# EAGLE board SchematicTSC (EAGLE 9.7.0)
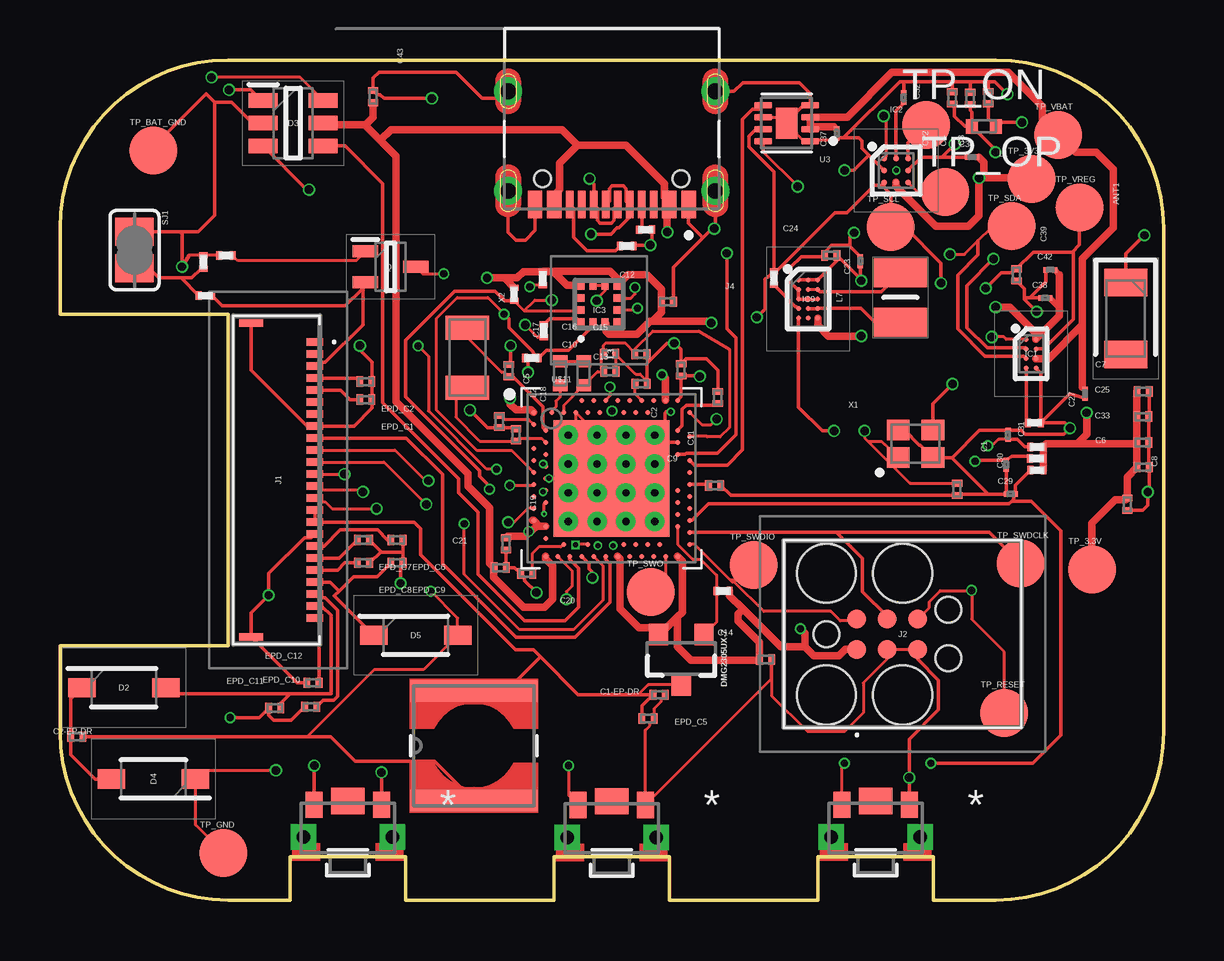
[diagram p0: board, top side]
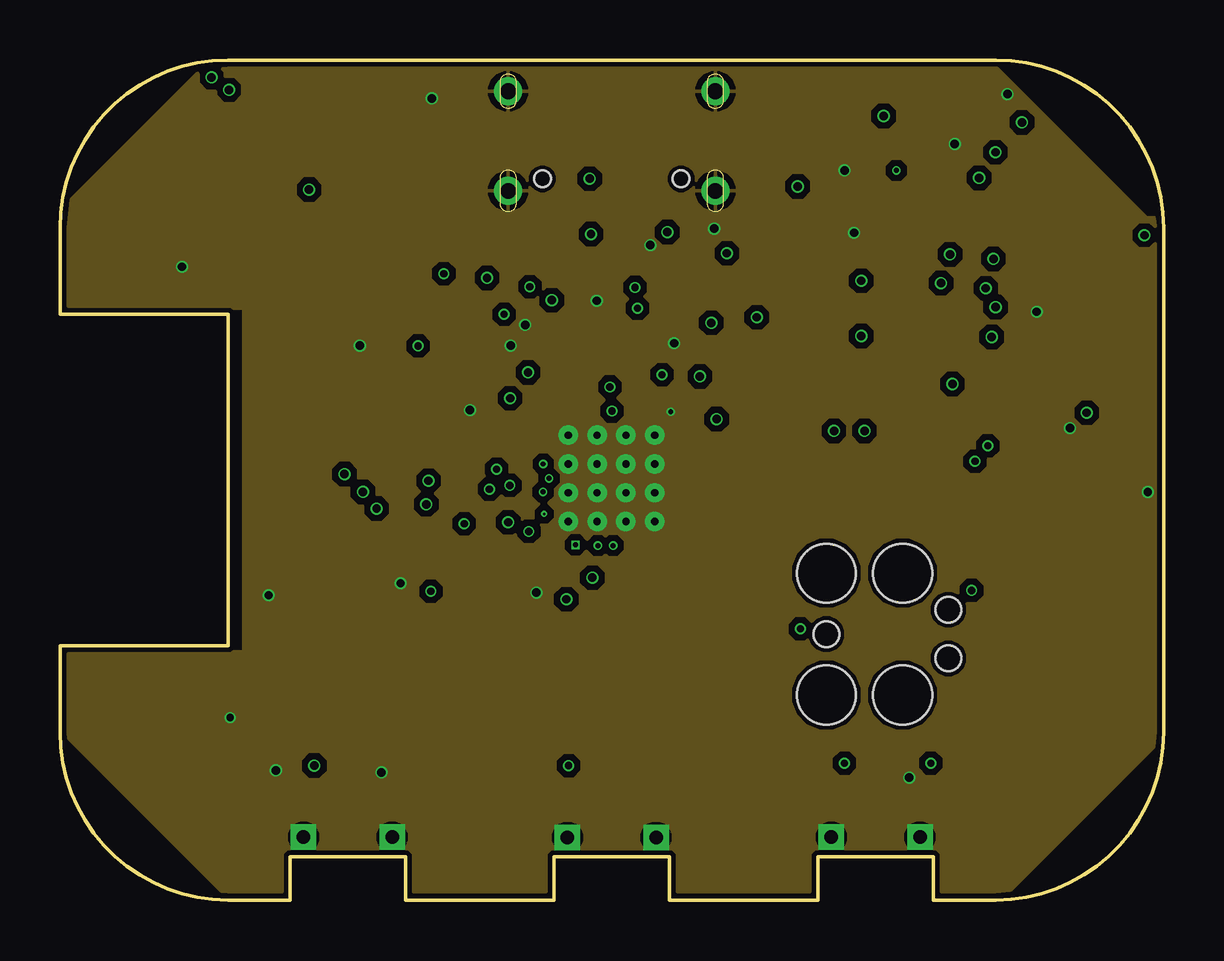
[diagram p1: board, inner layer Route2]
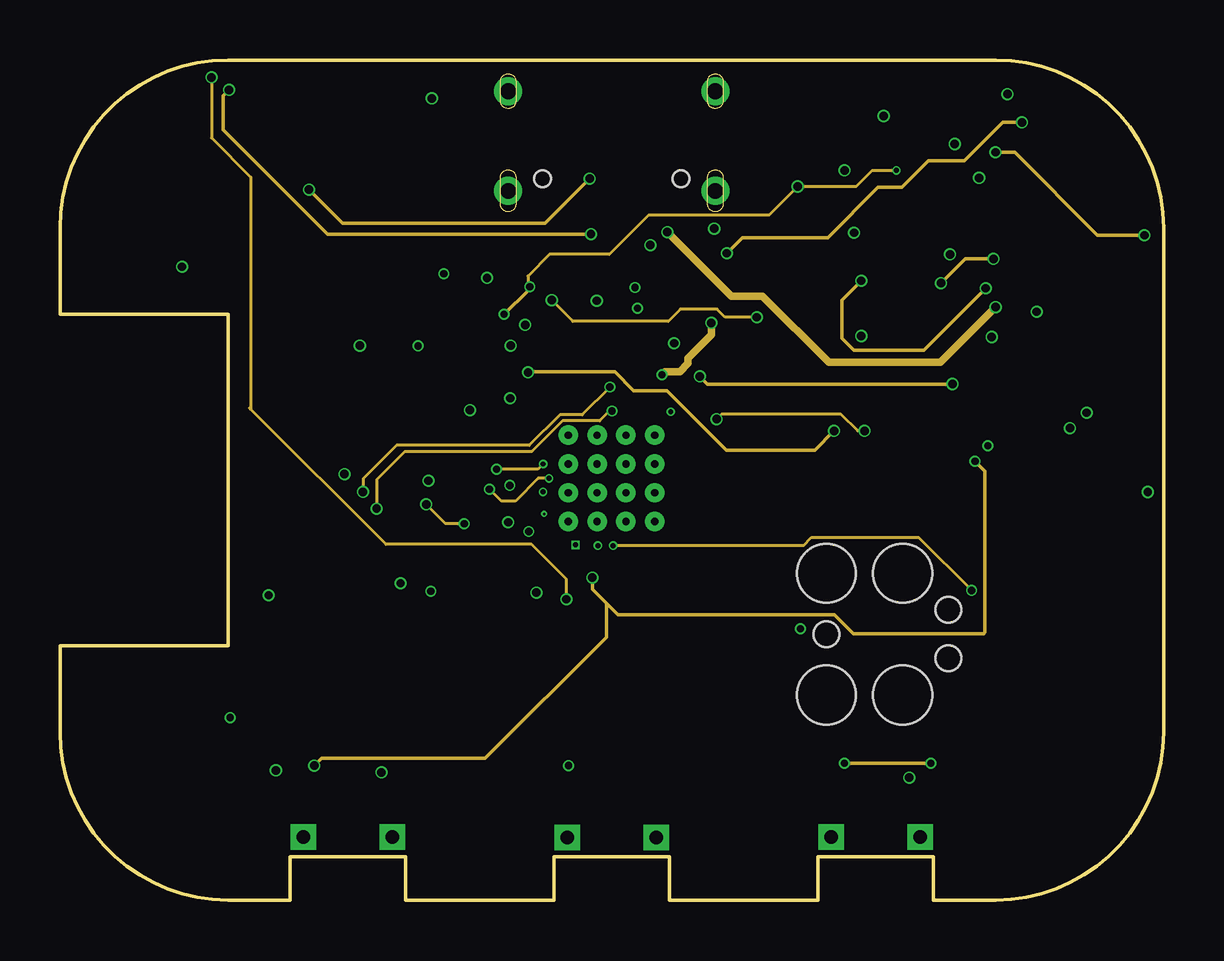
[diagram p2: board, inner layer Route63]
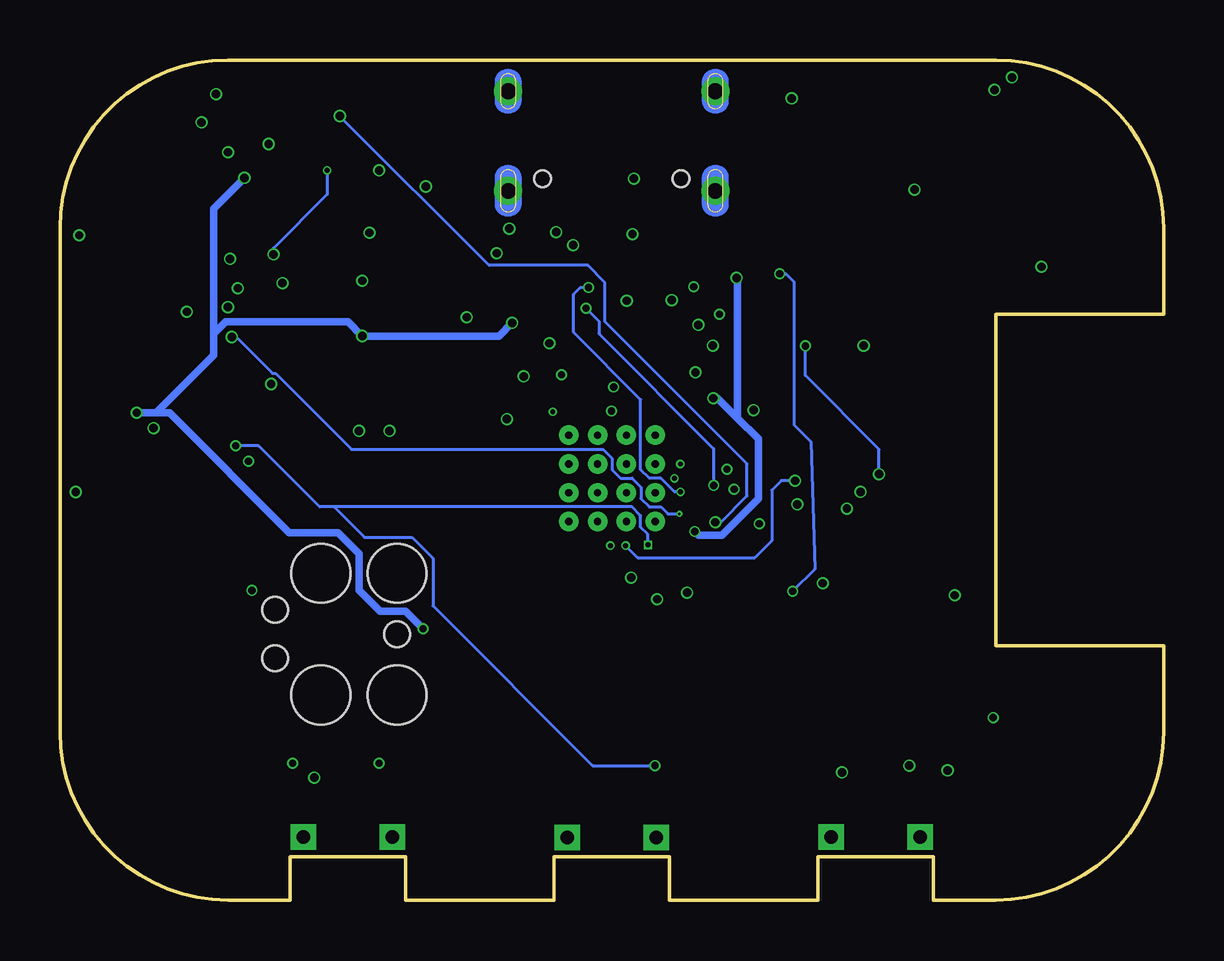
[diagram p3: board, bottom side, seen from below]

Size 46 x 35 mm. Coordinates in mm from the lower left corner, seen from the top.
Outline: 39,0 36.4,0 36.4,1.8 31.6,1.8 31.6,0 25.4,0 25.4,1.8 20.6,1.8 20.6,0 14.4,0 14.4,1.8 9.6,1.8 9.6,0 7,0 arc-90 0,7 0,10.6 7,10.6 7,24.4 0,24.4 0,28 arc-90 7,35 39,35 arc-90 46,28 46,7 arc-90 39,0
Copper layers (1+2*15+16): Top / Route2 / Route63 / Bottom
Stack-up 4 Layer Stack: Top SilkScreen Epoxy Ink / Top SolderMask SR:Green 0.0254mm Dk 4.3 / Top Surface Finish Lead-Free 0.02mm / Top User Defined 0.0151mm / Dielectric-1 User Defined 0.15mm / Route2 User Defined 0.0145mm / Dielectric-3 User Defined 0.55mm / Route63 User Defined 0.0145mm / Dielectric-5 User Defined 0.15mm / Bottom User Defined 0.0151mm / Bottom Surface Finish Lead-Free 0.02mm / Bottom SolderMask SR:Green 0.0254mm Dk 4.3 / Bottom SilkScreen Epoxy Ink
Design rules: minimum copper width 5mil, minimum drill size 0.3mm, copper clearance wire_polygon to wire_polygon 5mil, copper clearance wire_polygon to pad_smd 5mil, copper clearance wire_polygon to via 5mil, copper clearance pad_smd to pad_smd 5mil, copper clearance pad_smd to via 5mil, copper clearance via to via 5mil, copper clearance smd to pad (same net) 5mil, copper clearance smd to via (same net) 5mil, copper clearance smd to smd (same net) 5mil, dimension clearance 0.2mm, via restrict clearance 0mil, restrict clearance 0mil, drill distance 6mil, keepout clearance 0mil

## Footprints (pad centres in the part's own frame; a part is rotated, then mirrored left to right if it is on the bottom)
2450AT18B100E_ANTC3216X140N = smd 1.15 x 1.8: 1 -1.5,0; 2 1.5,0
NORDIC_NRF_3_RESC0201_L = smd 0.28 x 0.43: 1 -0.255,0; 2 0.255,0
GRM011R60J152KE01L_2_CAPC0201X13N = smd 0.22 x 0.23: 1 -0.185,0; 2 0.185,0
ESP32_C6_LIBRARY_5_SOD3716X135N = smd 1.15 x 0.8: 1 -1.75,0; 2 1.75,0
ESP32_C6_LIBRARY_3_SOT95P280X145-6N = smd 1.2 x 0.6: 1 -1.25,0.95; 2 -1.25,0; 3 -1.25,-0.95; 4 1.25,-0.95; 5 1.25,0; 6 1.25,0.95
ESP32_C6_LIBRARY_4_ESP32_C6_LIBRARY_4_ESP32_C6_LIBRARY_4_ESP32_C6_LIBRARY_4_ESP32_WROVER_SPARKFUN-DISCRETESEMI_SOT23-3 = smd 0.8 x 0.9: 1 -0.95,-1; 2 0.95,-1; 3 0,1.1
BQ25180YBGR_BGA8C40P2X4_100X155X50 = smd 0.2 x 0.2: A1 -0.2,0.6; A2 0.2,0.6; B1 -0.2,0.2; B2 0.2,0.2; C1 -0.2,-0.2; C2 0.2,-0.2; D1 -0.2,-0.6; D2 0.2,-0.6
DRV2605YZFR_BGA9C50P3X3_144X144X62 = smd 0.25 x 0.25: A1 -0.5,0.5; A2 0,0.5; A3 0.5,0.5; B1 -0.5,0; B2 0,0; B3 0.5,0; C1 -0.5,-0.5; C2 0,-0.5; C3 0.5,-0.5
BMA423_BMA423 = smd 0.3 x 0.35: 1 -0.75,-0.775; 2 -0.25,-0.775; 3 0.25,-0.775; 4 0.75,-0.775; 7 0.75,0.775; 8 0.25,0.775; 9 -0.25,0.775; 10 -0.75,0.775 | smd 0.35 x 0.3: 5 0.775,-0.25; 6 0.775,0.25; 11 -0.775,0.25; 12 -0.775,-0.25
RT6160AWSC_BGA15C40P3X5_140X230X60 = smd 0.216 x 0.216: A1 -0.4,0.8; A2 0,0.8; A3 0.4,0.8; B1 -0.4,0.4; B2 0,0.4; B3 0.4,0.4; C1 -0.4,0; C2 0,0; C3 0.4,0; D1 -0.4,-0.4; D2 0,-0.4; D3 0.4,-0.4; E1 -0.4,-0.8; E2 0,-0.8; E3 0.4,-0.8
503480-2400_5034802400 = smd 0.3 x 0.7: 1 -5.75,1.525; 2 -5.25,1.525; 3 -4.75,1.525; 4 -4.25,1.525; 5 -3.75,1.525; 6 -3.25,1.525; 7 -2.75,1.525; 8 -2.25,1.525; 9 -1.75,1.525; 10 -1.25,1.525; 11 -0.75,1.525; 12 -0.25,1.525; 13 0.25,1.525; 14 0.75,1.525; 15 1.25,1.525; 16 1.75,1.525; 17 2.25,1.525; 18 2.75,1.525; 19 3.25,1.525; 20 3.75,1.525; 21 4.25,1.525; 22 4.75,1.525; 23 5.25,1.525; 24 5.75,1.525 | smd 0.3 x 1: MP1 -6.54,-1.125; MP2 6.54,-1.125
TC2030-IDC_TC2030IDC = smd 0.783 x 0.783: 1 -0.953,-0.635; 2 -0.953,0.635; 3 0.317,-0.635; 4 0.317,0.635; 5 1.588,-0.635; 6 1.588,0.635 | hole 2.451: -2.223,-2.54; -2.223,2.54; 0.952,-2.54; 0.952,2.54 | hole 1.067: -2.223,0; 2.857,-1.016; 2.857,1.016
KH-TYPE-C-16P_KINGHELM_KH-TYPE-C-16P = smd 0.6 x 1.15: A1_B12 -3.2,4.725; A4_B9 -2.4,4.725; A9_B4 2.4,4.725; A12_B1 3.2,4.725 | smd 0.3 x 1.15: A5 -1.25,4.725; A6 -0.25,4.725; A7 0.25,4.725; A8 1.25,4.725; B5 1.75,4.725; B6 0.75,4.725; B7 -0.75,4.725; B8 -1.75,4.725 | drill 0.65 pad 1.05: SH1 -4.32,0; SH2 4.32,0; SH3 -4.32,4.15; SH4 4.32,4.15 | hole 0.7: -2.89,3.65; 2.89,3.65
NORDIC_NRF_2_RESC0402_L = smd 0.5 x 0.6: 1 -0.5,0; 2 0.5,0
ESP32_C6_LIBRARY_2_IND_4828-WE-TPC_WRE = smd 0.9 x 5.3: 1 -2.286,0; 2 2.286,0
MLP2016SR47MT0S1_INDC2016X100N = smd 1.2 x 2.2: 1 -1.028,0; 2 1.028,0
ESP32_C6_LIBRARY_6_SOT65P210X110-3N = smd 1.05 x 0.5: 1 -1.05,0.65; 2 -1.05,-0.65; 3 1.05,0
CPF0201D7K68C1_0201 = smd 0.35 x 0.25: 1 0,0.275; 2 0,-0.275
ESP32_C6_LIBRARY_7_JUMPER_SJ = smd 1.168 x 1.6: 1 -0.762,0; 2 0.762,0
2025-10-22_07-23-44_LIBRARY_SW_EVP-AKE31A_PAN = smd 0.711 x 1.092: 1 -1.4,-0.972; 2 1.4,-0.972 | drill 0.559 pad 0.914 square: 3 -1.848,0.381; 4 1.848,0.381 | smd 1.397 x 1.092: 5 0,-1.124
HECTOR_WATCH_1_TP20R = smd 2 x 2: TP 0,0
ESP32_C6_LIBRARY_SON50P200X200X80-9N = smd 0.76 x 0.27: 1 -0.985,0.75; 2 -0.985,0.25; 3 -0.985,-0.25; 4 -0.985,-0.75; 5 0.985,-0.75; 6 0.985,-0.25; 7 0.985,0.25; 8 0.985,0.75 | smd 0.9 x 1.3: 9 0,0
NORDIC_NRF_4_AQFN50P700X700X85_HS-74N = smd 4.85 x 4.85: P$74 0,0 | drill 0.3 pad 0.6: P$75 -1.8,1.8; P$76 -0.6,1.8; P$77 0.6,1.8; P$78 1.8,1.8; P$79 -1.8,0.6; P$80 -0.6,0.6; P$81 0.6,0.6; P$82 1.8,0.6; P$83 -1.8,-0.6; P$84 -0.6,-0.6; P$85 0.6,-0.6; P$86 1.8,-0.6; P$87 -1.8,-1.8; P$88 -0.6,-1.8; P$89 0.6,-1.8; P$90 1.8,-1.8 | smd 0.2 x 0.2: P$A8 -1.25,3.25; P$A10 -0.75,3.25; P$A12 -0.25,3.25; P$A14 0.25,3.25; P$A16 0.75,3.25; P$A18 1.25,3.25; P$A20 1.75,3.25; P$A22 2.25,3.25; P$A23 2.75,3.25; P$AA24 3.25,-2.25; P$AB2 -2.75,-2.5; P$AC5 -2,-2.75; P$AC9 -1,-2.75; P$AC11 -0.5,-2.75; P$AC13 0,-2.75; P$AC15 0.5,-2.75; P$AC17 1,-2.75; P$AC19 1.5,-2.75; P$AC21 2,-2.75; P$AC24 3.25,-2.75; P$AD2 -2.75,-3.25; P$AD4 -2.25,-3.25; P$AD6 -1.75,-3.25; P$AD8 -1.25,-3.25; P$AD10 -0.75,-3.25; P$AD12 -0.25,-3.25; P$AD14 0.25,-3.25; P$AD16 0.75,-3.25; P$AD18 1.25,-3.25; P$AD20 1.75,-3.25; P$AD22 2.25,-3.25; P$AD23 2.75,-3.25; P$B1 -3.25,2.75; P$B3 -2.5,2.75; P$B5 -2,2.75; P$B7 -1.5,2.75; P$B9 -1,2.75; P$B11 -0.5,2.75; P$B13 0,2.75; P$B15 0.5,2.75; P$B17 1,2.75; P$B19 1.5,2.75; P$B24 3.25,2.75; P$C1 -3.25,2.25; P$D2 -2.75,2; P$D23 2.75,2; P$E24 3.25,1.75; P$F2 -2.75,1.5; P$F23 2.75,1.5; P$G1 -3.25,1.25; P$H2 -2.75,1; P$H23 2.75,1; P$J1 -3.25,0.75; P$J24 3.25,0.75; P$K2 -2.75,0.5; P$L1 -3.25,0.25; P$L24 3.25,0.25; P$M2 -2.75,0; P$N1 -3.25,-0.25; P$N24 3.25,-0.25; P$P2 -2.75,-0.5; P$P23 2.75,-0.5; P$R1 -3.25,-0.75; P$R24 3.25,-0.75; P$T2 -2.75,-1; P$T23 2.75,-1; P$U1 -3.25,-1.25; P$U24 3.25,-1.25; P$V23 2.75,-1.5; P$W1 -3.25,-1.75; P$W24 3.25,-1.75; P$Y2 -2.75,-2; P$Y23 2.75,-2
NORDIC_NRF_BT-XTAL_2016_N = smd 0.95 x 0.85: 1 -0.725,-0.575; 2 0.725,-0.575; 3 0.725,0.575; 4 -0.725,0.575
NORDIC_NRF_1_XTAL_3215_N = smd 1 x 1.8: 1 -1.25,0; 2 1.25,0

## Placement (x,y rotation side)
ANT1  2450AT18B100E  [2450AT18B100E_ANTC3216X140N]  44.42,24.23 270 top
C1  12pF  [NORDIC_NRF_3_RESC0201_L]  37.39,17.11 270 top
C1-EP-DR  10uF  [NORDIC_NRF_3_RESC0201_L]  24.51,7.56 0 top
C2  12pF  [NORDIC_NRF_3_RESC0201_L]  25.89,22.09 90 top
C2-EP-DR  4.7uF/25V  [NORDIC_NRF_3_RESC0201_L]  0.71,6.8 0 top
C3  1pF  [NORDIC_NRF_3_RESC0201_L]  38.69,33.43 90 top
C4  1pF  [NORDIC_NRF_3_RESC0201_L]  37.94,33.4 90 top
C5  100nF  [NORDIC_NRF_3_RESC0201_L]  18.31,19.94 270 top
C6  4.7μF  [NORDIC_NRF_3_RESC0201_L]  45.15,18.03 0 top
C7  100nF  [NORDIC_NRF_3_RESC0201_L]  45.15,21.19 0 top
C8  100nF  [NORDIC_NRF_3_RESC0201_L]  44.49,16.49 270 top
C9  820pF  [NORDIC_NRF_3_RESC0201_L]  27.29,17.27 0 top
C10  N. C.  [NORDIC_NRF_3_RESC0201_L]  22.92,22.02 0 top
C11  100pF  [NORDIC_NRF_3_RESC0201_L]  27.42,20.94 90 top
C12  100nF  [NORDIC_NRF_3_RESC0201_L]  25.32,24.93 0 top
C13  N. C.  [NORDIC_NRF_3_RESC0201_L]  24.22,21.51 0 top
C14  4.7μF  [NORDIC_NRF_3_RESC0201_L]  29.41,10.02 0 top
C15  1.0μF  [NORDIC_NRF_3_RESC0201_L]  24.21,22.74 0 top
C16  47nF  [NORDIC_NRF_3_RESC0201_L]  22.91,22.76 0 top
C17  12pF  [NORDIC_NRF_3_RESC0201_L]  18.71,22.06 270 top
C18  12pF  [NORDIC_NRF_3_RESC0201_L]  19.01,19.38 270 top
C19  100nF  [NORDIC_NRF_3_RESC0201_L]  18.59,14.84 270 top
C20  4.7μF  [NORDIC_NRF_3_RESC0201_L]  19.45,13.61 180 top
C21  4.7μF  [NORDIC_NRF_3_RESC0201_L]  18.35,13.85 0 top
C22  N. C.  [NORDIC_NRF_3_RESC0201_L]  37.19,33.42 90 top
C23  0.1uF  [GRM011R60J152KE01L_2_CAPC0201X13N]  33.36,26.62 90 top
C24  10uF  [NORDIC_NRF_3_RESC0201_L]  32.13,26.86 0 top
C25  22uF  [NORDIC_NRF_3_RESC0201_L]  45.13,20.14 0 top
C27  0.1uF  [GRM011R60J152KE01L_2_CAPC0201X13N]  42.72,21.09 90 top
C29  1uF  [GRM011R60J152KE01L_2_CAPC0201X13N]  39.63,16.91 0 top
C30  1uF  [GRM011R60J152KE01L_2_CAPC0201X13N]  39.43,18.14 90 top
C31  1uF  [GRM011R60J152KE01L_2_CAPC0201X13N]  39.52,19.38 270 top
C32  1uF  [GRM011R60J152KE01L_2_CAPC0201X13N]  35.17,33.44 270 top
C33  22uF  [NORDIC_NRF_3_RESC0201_L]  45.13,19.06 0 top
C34  0.1uF  [GRM011R60J152KE01L_2_CAPC0201X13N]  38.02,30.95 0 top
C37  1uF  [GRM011R60J152KE01L_2_CAPC0201X13N]  32.37,31.94 90 top
C38  1uF  [GRM011R60J152KE01L_2_CAPC0201X13N]  41.07,25.08 0 top
C39  10uF  [NORDIC_NRF_3_RESC0201_L]  39.87,26.05 270 top
C42  0.1uF  [GRM011R60J152KE01L_2_CAPC0201X13N]  41.28,26.26 0 top
C43  4.7uF  [NORDIC_NRF_3_RESC0201_L]  13.05,33.47 270 top
D2  MBR0530  [ESP32_C6_LIBRARY_5_SOD3716X135N]  2.66,8.85 0 top
D3  USBLC6-2SC6Y  [ESP32_C6_LIBRARY_3_SOT95P280X145-6N]  9.72,32.37 0 top
D4  MBR0530  [ESP32_C6_LIBRARY_5_SOD3716X135N]  3.9,5.04 180 top
D5  MBR0530  [ESP32_C6_LIBRARY_5_SOD3716X135N]  14.83,11.03 0 top
DMG2305UX-7  20V/4.2A/52mΩ/1.4W  [ESP32_C6_LIBRARY_4_ESP32_C6_LIBRARY_4_ESP32_C6_LIBRARY_4_ESP32_C6_LIBRARY_4_ESP32_WROVER_SPARKFUN-DISCRETESEMI_SOT23-3]  25.9,10.06 180 top
EPD_C1  1uF/50V  [NORDIC_NRF_3_RESC0201_L]  12.75,20.85 180 top
EPD_C2  1uF/50V  [NORDIC_NRF_3_RESC0201_L]  12.75,21.6 180 top
EPD_C5  1uF/50V  [NORDIC_NRF_3_RESC0201_L]  24.98,8.55 180 top
EPD_C6  1uF/50V  [NORDIC_NRF_3_RESC0201_L]  14.05,15 180 top
EPD_C7  1uF/50V  [NORDIC_NRF_3_RESC0201_L]  12.65,15 180 top
EPD_C8  1uF/50V  [NORDIC_NRF_3_RESC0201_L]  12.65,14.05 180 top
EPD_C9  1uF/50V  [NORDIC_NRF_3_RESC0201_L]  14.05,14.05 180 top
EPD_C10  1uF/50V  [NORDIC_NRF_3_RESC0201_L]  10.45,8.05 0 top
EPD_C11  1uF/50V  [NORDIC_NRF_3_RESC0201_L]  8.95,8 0 top
EPD_C12  1uF/50V  [NORDIC_NRF_3_RESC0201_L]  10.55,9.05 0 top
IC1  BQ25180YBGR  [BQ25180YBGR_BGA8C40P2X4_100X155X50]  40.48,22.76 0 top
IC2  DRV2605YZFR  [DRV2605YZFR_BGA9C50P3X3_144X144X62]  34.85,30.4 0 top
IC3  BMA423_BMA423  [BMA423_BMA423]  22.47,24.83 0 top
IC9  RT6160AWSC  [RT6160AWSC_BGA15C40P3X5_140X230X60]  31.19,25.04 0 top
J1  503480-2400  [503480-2400_5034802400]  9.1,17.5 270 top
J2  IDC_TC2030-IDC  [TC2030-IDC_TC2030IDC]  34.17,11.08 0 top
J4  KH-TYPE-C-16P  [KH-TYPE-C-16P_KINGHELM_KH-TYPE-C-16P]  23,33.7 180 top
L1  3.9nH  [NORDIC_NRF_2_RESC0402_L]  38.52,32.23 180 top
L2  10μH  [NORDIC_NRF_2_RESC0402_L]  20.85,21.94 90 top
L3  15nH  [NORDIC_NRF_2_RESC0402_L]  21.83,21.94 270 top
L5  68uH  [ESP32_C6_LIBRARY_2_IND_4828-WE-TPC_WRE]  17.25,6.43 90 top
L7  FTC252012SR47MBCA  [MLP2016SR47MT0S1_INDC2016X100N]  35.03,25.11 270 top
Q3  SI1308EDL-T1-GE3  [ESP32_C6_LIBRARY_6_SOT65P210X110-3N]  13.78,26.38 0 top
R1_EP_DR  0.47  [CPF0201D7K68C1_0201]  6.06,25.18 90 top
R1_USB  5K1  [CPF0201D7K68C1_0201]  24.41,27.93 270.4 top
R2  0  [CPF0201D7K68C1_0201]  19.67,22.58 270 top
R2_EP_DR  10K  [CPF0201D7K68C1_0201]  6.92,26.86 90 top
R2_USB  5K1  [CPF0201D7K68C1_0201]  23.63,27.25 90 top
R3  0  [CPF0201D7K68C1_0201]  20.17,23.72 0 top
R4  0  [CPF0201D7K68C1_0201]  29.76,25.92 0 top
R5  10K  [CPF0201D7K68C1_0201]  40.71,18.4 90 top
R7  10K  [CPF0201D7K68C1_0201]  40.72,17.91 90 top
R8  10K  [CPF0201D7K68C1_0201]  40.72,18.88 90 top
R9  10K  [CPF0201D7K68C1_0201]  40.62,19.88 270 top
R17  3K3  [CPF0201D7K68C1_0201]  18.93,25.24 0 top
R18  3K3  [CPF0201D7K68C1_0201]  20.13,25.9 0 top
R_PWR_EPD  10K  [CPF0201D7K68C1_0201]  27.64,12.88 90 top
R_TYPE_SEL  2.2  [CPF0201D7K68C1_0201]  5.98,26.58 0 top
SJ1  [ESP32_C6_LIBRARY_7_JUMPER_SJ]  3.11,27.08 270 top
SW_DN  2025-10-22_07-23-44_LIBRARY_EVP-AKE31ASW_EVP-AKE31A_PAN  [2025-10-22_07-23-44_LIBRARY_SW_EVP-AKE31A_PAN]  34,3 180 top
SW_ENT  2025-10-22_07-23-44_LIBRARY_EVP-AKE31ASW_EVP-AKE31A_PAN  [2025-10-22_07-23-44_LIBRARY_SW_EVP-AKE31A_PAN]  23,2.99 180 top
SW_UP  2025-10-22_07-23-44_LIBRARY_EVP-AKE31ASW_EVP-AKE31A_PAN  [2025-10-22_07-23-44_LIBRARY_SW_EVP-AKE31A_PAN]  12,3 180 top
TP_3.3V  HECTOR_WATCH_1_TPTP20R  [HECTOR_WATCH_1_TP20R]  43.02,13.78 0 top
TP_3V3  HECTOR_WATCH_1_TPTP20R  [HECTOR_WATCH_1_TP20R]  40.5,30.04 0 top
TP_BAT_GND  HECTOR_WATCH_1_TPTP20R  [HECTOR_WATCH_1_TP20R]  3.89,31.23 0 top
TP_GND  HECTOR_WATCH_1_TPTP20R  [HECTOR_WATCH_1_TP20R]  6.82,1.96 0 top
TP_ON  HECTOR_WATCH_1_TPTP20R  [HECTOR_WATCH_1_TP20R]  36.1,32.3 0 top
TP_OP  HECTOR_WATCH_1_TPTP20R  [HECTOR_WATCH_1_TP20R]  36.9,29.5 0 top
TP_RESET  HECTOR_WATCH_1_TPTP20R  [HECTOR_WATCH_1_TP20R]  39.36,7.8 0 top
TP_SCL  HECTOR_WATCH_1_TPTP20R  [HECTOR_WATCH_1_TP20R]  34.63,28.03 0 top
TP_SDA  HECTOR_WATCH_1_TPTP20R  [HECTOR_WATCH_1_TP20R]  39.67,28.08 0 top
TP_SWDCLK  HECTOR_WATCH_1_TPTP20R  [HECTOR_WATCH_1_TP20R]  40.05,14.02 0 top
TP_SWDIO  HECTOR_WATCH_1_TPTP20R  [HECTOR_WATCH_1_TP20R]  28.92,13.96 0 top
TP_SWO  HECTOR_WATCH_1_TPTP20R  [HECTOR_WATCH_1_TP20R]  24.62,12.84 0 top
TP_VBAT  HECTOR_WATCH_1_TPTP20R  [HECTOR_WATCH_1_TP20R]  41.61,31.88 0 top
TP_VREG  HECTOR_WATCH_1_TPTP20R  [HECTOR_WATCH_1_TP20R]  42.5,28.86 0 top
U3  MAX17048G+T10  [ESP32_C6_LIBRARY_SON50P200X200X80-9N]  30.29,32.37 180 top
U$11  NRF52840_QF  [NORDIC_NRF_4_AQFN50P700X700X85_HS-74N]  22.99,17.57 0 top
X1  32MHz  [NORDIC_NRF_BT-XTAL_2016_N]  35.66,19.01 0 top
X2  32.769kHz  [NORDIC_NRF_1_XTAL_3215_N]  16.98,22.6 270 top

## Library data of the parts
ANT1 = InkTime_v5; ARROW_PART_NUMBER: 2450AT18B100E; ARROW_PRICE-STOCK: https://www.arrow.com/en/products/2450at18b100e/johanson-dielectrics?utm_currency=USD&region=nac; DESCRIPTION: Antennas 2.45GHz ANTENNA; HEIGHT: 1.4mm; MANUFACTURER_NAME: JOHANSON TECHNOLOGY; MANUFACTURER_PART_NUMBER: 2450AT18B100E; MOUSER_PART_NUMBER: 609-2450AT18B100E; MOUSER_PRICE-STOCK: https://www.mouser.co.uk/ProductDetail/Johanson-Technology/2450AT18B100E?qs=yCnrNFeXz%252Bh5MFsFIXGZGA%3D%3D
C1 C1-EP-DR C2 C2-EP-DR C3-C22 C24 C25 C33 C39 C43 EPD_C1 EPD_C2 EPD_C5-EPD_C12 L1-L3 R1_EP_DR R1_USB R2 R2_EP_DR R2_USB R3-R5 R7-R9 R17 R18 R_PWR_EPD R_TYPE_SEL SJ1 TP_3.3V TP_3V3 TP_BAT_GND TP_GND TP_ON TP_OP TP_RESET TP_SCL TP_SDA TP_SWDCLK TP_SWDIO TP_SWO TP_VBAT TP_VREG U$11 X1 X2 = InkTime_v5
C23 C27 C29-C32 C34 C37 C38 C42 = InkTime_v5; AVAILABILITY: In Stock; CHECK_PRICES: https://www.snapeda.com/parts/GRM011R60J152KE01L/Murata/view-part/?ref=eda; DESCRIPTION: SMD Capacitor X5R(EIA) with Capacitance: 1500pF Tol. 10%. Rated Voltage: 6.3Vdc; MF: Murata; MP: GRM011R60J152KE01L; PACKAGE: 0201 Murata; PRICE: None; SNAPEDA_LINK: https://www.snapeda.com/parts/GRM011R60J152KE01L/Murata/view-part/?ref=snap
D2 D4 D5 = InkTime_v5; AVAILABILITY: In Stock; CHECK_PRICES: https://www.snapeda.com/parts/MBR0530/Onsemi/view-part/?ref=eda; DESCRIPTION: Diode Schottky 30 V 500mA Surface Mount SOD-123; MF: ON Semiconductor; MP: MBR0530; PACKAGE: SOD-123-2 ON Semiconductor; PRICE: None; PURCHASE-URL: https://www.snapeda.com/api/url_track_click_mouser/?unipart_id=179458&manufacturer=ON Semiconductor&part_name=MBR0530&search_term=None; SNAPEDA_LINK: https://www.snapeda.com/parts/MBR0530/Onsemi/view-part/?ref=snap
D3 = InkTime_v5; AVAILABILITY: In Stock; CHECK_PRICES: https://www.snapeda.com/parts/USBLC6-2SC6Y/STMicroelectronics/view-part/?ref=eda; DESCRIPTION: 17V Clamp 5A (8/20µs) Ipp Tvs Diode Surface Mount SOT-23-6; MF: STMicroelectronics; MP: USBLC6-2SC6Y; PACKAGE: SOT-23-6 STMicroelectronics; PRICE: None; SNAPEDA_LINK: https://www.snapeda.com/parts/USBLC6-2SC6Y/STMicroelectronics/view-part/?ref=snap
DMG2305UX-7 = InkTime_v5; PROD_ID: TRAN-14388
IC1 = InkTime_v5; ARROW_PART_NUMBER: BQ25180YBGR; ARROW_PRICE-STOCK: https://www.arrow.com/en/products/bq25180ybgr/texas-instruments?utm_currency=USD&region=nac; DESCRIPTION: Charger IC Lithium Ion/Polymer, Lithium Iron Phosphate 8-DSBGA (1.6x1.1); HEIGHT: 0.5mm; MANUFACTURER_NAME: Texas Instruments; MANUFACTURER_PART_NUMBER: BQ25180YBGR; MOUSER_PART_NUMBER: 595-BQ25180YBGR; MOUSER_PRICE-STOCK: https://www.mouser.co.uk/ProductDetail/Texas-Instruments/BQ25180YBGR?qs=doiCPypUmgEWjAK%252BJAX6Tw%3D%3D
IC2 = InkTime_v5; ARROW_PART_NUMBER: DRV2605YZFR; ARROW_PRICE-STOCK: https://www.arrow.com/en/products/drv2605yzfr/texas-instruments?region=nac; DESCRIPTION: Haptic Driver for ERM/LRA with Built-In Library and Smart Loop Architecture; HEIGHT: 0.625mm; MANUFACTURER_NAME: Texas Instruments; MANUFACTURER_PART_NUMBER: DRV2605YZFR
IC3 = InkTime_v5; ARROW_PART_NUMBER: BMA423; ARROW_PRICE-STOCK: https://www.arrow.com/en/products/bma423/bosch; DESCRIPTION: Accelerometers Triaxial low-g 12bit Acceleration Sensor; HEIGHT: 1mm; MANUFACTURER_NAME: BOSCH; MANUFACTURER_PART_NUMBER: BMA423; MOUSER_PART_NUMBER: 262-BMA423; MOUSER_PRICE-STOCK: https://www.mouser.co.uk/ProductDetail/Bosch-Sensortec/BMA423?qs=HXFqYaX1Q2xC%252BSgeGoX3mg%3D%3D
IC9 = InkTime_v5; DESCRIPTION: Buck-Boost Regulator Positive Output Step-Up/Step-Down I2C DC-DC Controller IC 15-WL-CSP (BSC) (1.4x2.3); HEIGHT: 0.6mm; MANUFACTURER_NAME: RICHTEK; MANUFACTURER_PART_NUMBER: RT6160AWSC; MOUSER_PART_NUMBER: 835-RT6160AWSC; MOUSER_PRICE-STOCK: https://www.mouser.co.uk/ProductDetail/Richtek/RT6160AWSC?qs=amGC7iS6iy%2FLd9PSoixZXQ%3D%3D
J1 = InkTime_v5; DESCRIPTION: FFC & FPC Connectors 0.5mm FPC RA SMT Dual Contact 24Ckt; HEIGHT: 1.87mm; MANUFACTURER_NAME: Molex; MANUFACTURER_PART_NUMBER: 503480-2400; MOUSER_PART_NUMBER: 538-503480-2400; MOUSER_PRICE-STOCK: https://www.mouser.co.uk/ProductDetail/Molex/503480-2400?qs=OAhjpuo3Vu7efIoxFh9AOw%3D%3D
J2 = InkTime_v5; DESCRIPTION: CABLE ADAPTER 6 POS; HEIGHT: 19mm; MANUFACTURER_NAME: Tag Connect; MANUFACTURER_PART_NUMBER: TC2030-IDC
J4 = InkTime_v5; AVAILABILITY: Not in stock; CHECK_PRICES: https://www.snapeda.com/parts/KH-TYPE-C-16P/Kinghelm/view-part/?ref=eda; MF: kinghelm; MP: KH-TYPE-C-16P; PACKAGE: None; PRICE: None; SNAPEDA_LINK: https://www.snapeda.com/parts/KH-TYPE-C-16P/Kinghelm/view-part/?ref=snap
L5 = InkTime_v5; COPYRIGHT: Copyright (C) 2024 Ultra Librarian. All rights reserved.; MANUFACTURER_PART_NUMBER: 744043680; MFR_NAME: Wurth Electronics
L7 = InkTime_v5; DESCRIPTION: SMD / SMT Inductors (Coils), L=0.47?H, L x W x T :; HEIGHT: 1mm; JLCPCB: https://jlcpcb.com/partdetail/6763488-FTC252012SR47MBCA/C5832368; MANUFACTURER_NAME: TDK; MANUFACTURER_PART_NUMBER: FTC252012SR47MBCA
Q3 = InkTime_v5; AVAILABILITY: In Stock; CHECK_PRICES: https://www.snapeda.com/parts/SI1308EDL-T1-GE3/Vishay+Siliconix/view-part/?ref=eda; DESCRIPTION: Si1308EDL-T1-GE3 N-channel MOSFET Transistor, 1.5 A, 30 V, 3-Pin SC-70 | Siliconix / Vishay SI1308EDL-T1-GE3; MF: Vishay Siliconix; MP: SI1308EDL-T1-GE3; PACKAGE: SOT-323 Vishay Semiconductor; PRICE: None; PURCHASE-URL: https://www.snapeda.com/api/url_track_click_mouser/?unipart_id=274603&manufacturer=Vishay Siliconix&part_name=SI1308EDL-T1-GE3&search_term=None; SNAPEDA_LINK: https://www.snapeda.com/parts/SI1308EDL-T1-GE3/Vishay+Siliconix/view-part/?ref=snap
SW_DN SW_ENT SW_UP = InkTime_v5; COPYRIGHT: Copyright (C) 2025 Ultra Librarian. All rights reserved.; DIGI-KEY_PART_NUMBER_1: P123437TR-ND; DIGI-KEY_PART_NUMBER_2: P123437CT-ND; DIGI-KEY_PART_NUMBER_3: P123437DKR-ND; MANUFACTURER_NAME: Panasonic; MANUFACTURER_PART_NUMBER: EVP-AKE31A
U3 = InkTime_v5; AVAILABILITY: In Stock; CHECK_PRICES: https://www.snapeda.com/parts/MAX17048G+T10/Analog+Devices/view-part/?ref=eda; DESCRIPTION: 3µA 1-Cell/2-Cell Fuel Gauge with ModelGauge; MF: Analog Devices; MP: MAX17048G+T10; PACKAGE: TDFN-8 Maxim; PRICE: None; PURCHASE-URL: https://www.snapeda.com/api/url_track_click_mouser/?unipart_id=329239&manufacturer=Analog Devices&part_name=MAX17048G+T10&search_term=None; SNAPEDA_LINK: https://www.snapeda.com/parts/MAX17048G+T10/Analog+Devices/view-part/?ref=snap

## Nets
3V3: C6.1 C7.1 C8.1 C12.1 C14.1 C19.1 C25.1 C33.1 C34.2 DMG2305UX-7.2 IC2.C2 IC3.3 IC3.7 IC3.10 IC9.E3 J2.1 R5.2 R7.2 R8.2 R17.1 R18.1 R_PWR_EPD.2 TP_3.3V.TP TP_3V3.TP U$11.P$A22 U$11.P$AD14 U$11.P$AD23 U$11.P$B1 U$11.P$W1 U$11.P$Y2
ALERT: U3.5 U$11.P$J24
D+: D3.4 U$11.P$AD6
D-: D3.6 U$11.P$AD4
DEC4_^: C10.1 C15.1 C16.1 L3.2 U$11.P$B5 U$11.P$E24
DN: D3.1 J4.A7 J4.B7
DP: D3.3 J4.A6 J4.B6
EPD_3V3: C1-EP-DR.1 DMG2305UX-7.3 EPD_C5.2 J1.15 J1.16 L5.2
EPD_BUSY: J1.9 U$11.P$AD12
EPD_CS: J1.12 U$11.P$K2
EPD_DC: J1.11 U$11.P$AD10
EPD_RST: J1.10 U$11.P$AC11
GDR: J1.2
GND: C1-EP-DR.2 C1.2 C2.2 C3.2 C4.2 C5.2 C6.2 C7.2 C8.2 C9.2 C10.2 C11.2 C12.2 C13.2 C14.2 C15.2 C16.2 C17.1 C18.1 C19.2 C20.2 C21.2 C22.2 C23.2 C24.1 C25.2 C27.1 C29.1 C30.1 C31.1 C32.1 C33.2 C34.1 C37.1 C38.1 C39.2 C42.1 C43.1 D3.2 D4.1 EPD_C1.1 EPD_C2.1 EPD_C5.1 EPD_C6.1 EPD_C7.1 EPD_C8.1 EPD_C9.1 EPD_C10.1 EPD_C11.1 EPD_C12.1 IC1.D2 IC2.B1 IC2.B3 IC3.8 IC3.9 IC9.B1 IC9.C1 IC9.C2 IC9.C3 J1.8 J1.17 J1.MP1 J1.MP2 J2.3 J2.5 J4.A1_B12 J4.A12_B1 J4.SH1 J4.SH2 J4.SH3 J4.SH4 R1_USB.1 R2_EP_DR.1 R2_USB.2 R3.2 R9.1 R_TYPE_SEL.1 SJ1.1 SW_DN.1 SW_ENT.1 SW_UP.1 TP_BAT_GND.TP TP_GND.TP U3.1 U3.4 U3.6 U3.9 U$11.P$74 U$11.P$75 U$11.P$76 U$11.P$77 U$11.P$78 U$11.P$79 U$11.P$80 U$11.P$81 U$11.P$82 U$11.P$83 U$11.P$84 U$11.P$85 U$11.P$86 U$11.P$87 U$11.P$88 U$11.P$89 U$11.P$90 U$11.P$B7 U$11.P$F23 X1.2 X1.4
HAPTIC_EN: IC2.A1 U$11.P$U1
IMU_INT1: IC3.5 U$11.P$N1
IMU_INT2: IC3.6 U$11.P$P2
LX1: IC9.B2 IC9.B3 L7.1
LX2: IC9.D2 IC9.D3 L7.2
MOSI: J1.14 U$11.P$B13
N$1: L2.2 L3.1
N$2: C2-EP-DR.1 D2.1 D4.2
N$3: C2-EP-DR.2 D5.2 L5.1 Q3.3
N$7: IC1.D1 R9.2
N$8: C17.2 U$11.P$D2 X2.1
N$9: C18.2 U$11.P$F2 X2.2
N$12: C5.1 U$11.P$C1
N$14: L2.1 U$11.P$B3
N$15: C2.1 U$11.P$A23 X1.3
N$25: C13.1 U$11.P$A18
N$26: C11.1 U$11.P$D23
N$27: C32.2 IC2.A2
N$28: C1.1 U$11.P$B24 X1.1
N$29: Q3.1 R2_EP_DR.2
N$30: C3.1 L1.1 U$11.P$H23
N$31: C9.1 U$11.P$N24
N$32: EPD_C12.2 J1.24
N$34: R1_EP_DR.1 R_TYPE_SEL.2 SJ1.2
N$35: EPD_C10.2 J1.22
N$37: EPD_C8.2 J1.20
N$38: EPD_C7.2 J1.19
N$39: EPD_C6.2 J1.18
N$46: ANT1.1 C4.1 C22.1 L1.2
N$50: C20.1 U$11.P$AC5
N$53: EPD_C1.2 J1.5
N$54: EPD_C2.2 J1.4
N$60: J4.A5 R1_USB.2
N$63: J4.B5 R2_USB.1
N$73: IC9.D1 R4.2
N$75: IC9.E1 R2.2
N$85: IC3.1 R3.1
OUT+: IC2.A3 TP_ON.TP
OUT-: IC2.C3 TP_OP.TP
P0.04: U$11.P$J1
P0.09: U$11.P$L24
P0.13: C30.2 R5.1 SW_UP.2 U$11.P$AD8
P0.14: C31.2 R8.1 SW_ENT.2 U$11.P$AC9
P0.19: U$11.P$AC15
P0.20: U$11.P$AD16
P0.21: U$11.P$AC17
P0.22: U$11.P$AD18
P0.23: U$11.P$AC19
P0.24: U$11.P$AD20
P0.25: U$11.P$AC21
P0.26: U$11.P$G1
P0.27: U$11.P$H2
P0.28: U$11.P$B11
P0.29: U$11.P$A10
P0.30: U$11.P$B9
P0.31: U$11.P$A8
P1.01: DMG2305UX-7.1 R_PWR_EPD.1 U$11.P$Y23
P1.02: C29.2 R7.1 SW_DN.2 U$11.P$W24
P1.03: U$11.P$V23
P1.04: U$11.P$U24
P1.05: U$11.P$T23
P1.06: U$11.P$R24
P1.07: U$11.P$P23
P1.09: U$11.P$R1
P1.10: U$11.P$A20
P1.11: U$11.P$B19
P1.12: U$11.P$B17
P1.13: U$11.P$A16
P1.14: U$11.P$B15
P1.15: U$11.P$A14
PMIC_INT: IC1.A1 U$11.P$T2
PREVGH: D5.1 EPD_C9.2 J1.21
PREVGL: D2.2 EPD_C11.2 J1.23
RESE: J1.3 Q3.2 R1_EP_DR.2
RESET: J2.6 TP_RESET.TP U$11.P$AC13
SCK: J1.13 U$11.P$A12
SCL: IC1.B1 IC2.C1 IC3.12 R4.1 R17.2 TP_SCL.TP U3.7 U$11.P$M2
SDA: IC1.C1 IC2.B2 IC3.2 R2.1 R18.2 TP_SDA.TP U3.8 U$11.P$L1
SWDCLK: J2.4 TP_SWDCLK.TP U$11.P$AA24
SWDIO: J2.2 TP_SWDIO.TP U$11.P$AC24
SWO: TP_SWO.TP U$11.P$AD22
VBAT: C27.2 C37.2 IC1.C2 TP_VBAT.TP U3.2 U3.3
VBUS: C21.1 C38.2 C42.2 C43.2 D3.5 IC1.A2 J4.A4_B9 J4.A9_B4 U$11.P$AD2
VREG: C23.1 C24.2 C39.1 IC1.B2 IC9.A1 IC9.A2 IC9.A3 TP_VREG.TP

## Tracks (layer width: path | path; a pad name or v marks a point on that pad's centre or on a via)
3V3  (via drill 0.3 pad 0.04, 0.35)
  Top 0.254: C34.2 38.3,30.95
  Top 0.305: R7.2 R5.2 41,18.41 R8.2 41.12,19 42.4,19 42.41,19.01 | TP_3V3.TP 40.45,30.09 v38.31,30.09 | v33.4,23.5 32.03,23.5 31.59,23.94 IC9.E3 | 42.41,19.01 42.8,19.4 v42.8,20.3 | C33.1 C25.1 44.88,21.17 C7.1 | C33.1 44.88,18.05 C6.1 44.49,17.62 C8.1 44.42,16.68 43.99,16.68 43.02,15.71 TP_3.3V.TP | R17.1 18.53,25.92 v17.8,25.92 19.05,25.92 19.32,26.19 20.12,26.19 R18.1 | U$11.P$B1 19.64,20.42 19,20.42 18.77,20.66 v18.77,20.91 | J2.1 32.74,10.45 32.48,10.18 31.42,10.18 31.05,10.55 | 38.3,30.95 38.51,30.74 38.51,30.19 38.41,30.09 v38.31,30.09 | 24.69,24.11 25.07,24.48 C12.1 25.07,25.45 24.46,26.05 23.67,26.05 IC3.7 23.22,25.91 22.93,26.2 20.16,26.2 R18.1 | R18.1 20.57,26.18 21.14,25.61 IC3.10 | C19.1 18.65,15.16 19.4,15.16 19.6,15.36 | 19.71,15.82 U$11.P$W1 19.86,15.7 19.86,15.57 | U$11.P$AD14 23.34,14.22 23.34,12.14 24.13,11.35 24.66,11.35 DMG2305UX-7.2 25,11.06 25.74,11.8 | U$11.P$Y2 19.86,15.57 | 19.86,15.57 19.64,15.36 19.6,15.36 | 31.05,10.55 31.05,11.11 v30.86,11.3 | 28.47,12.12 30.05,10.55 31.05,10.55 | U$11.P$AD23 25.94,14.12 25.94,12 25.74,11.8 | 25.74,11.8 25.74,10.56 26.3,10 29.13,10 C14.1 29.16,10.75 28.26,11.64 28.26,11.91 28.47,12.12 | 28.47,12.12 27.91,12.68 R_PWR_EPD.2 | C33.1 44.82,19.01 42.41,19.01 | IC2.C2 34.85,29.74 36.51,28.07 37.87,28.07 38.31,28.51 v38.31,30.09 | IC3.3 22.77,24.01 22.77,23.7 22.89,23.58 24.06,23.58 24.59,24.11 24.69,24.11 | v19.54,15.36 19.6,15.36 | v27.15,24.05 27.09,24.11 24.69,24.11 | v25.09,21.89 25.24,21.75 U$11.P$A22
  Route63 0.305: v25.09,21.89 25.22,22.02 25.84,22.02 26.18,22.36 26.18,22.58 27.15,23.55 v27.15,24.05
  Bottom 0.305: v38.31,30.09 39.6,28.8 39.6,23.6 | 39.6,23.6 39.1,24.1 34,24.1 v33.4,23.5 27.7,23.5 v27.15,24.05 | 39.6,23.6 39.6,22.7 42,20.3 v42.8,20.3 41.43,20.3 36.44,15.31 34.41,15.31 33.53,14.44 33.53,12.9 32.66,12.03 31.59,12.03 v30.86,11.3 | 17.76,20.08 16.89,19.21 16.89,16.73 18.41,15.21 19.39,15.21 v19.54,15.36 | 17.76,20.08 18.59,20.91 v18.77,20.91 | 17.76,20.08 17.76,25.88 v17.8,25.92
ALERT
  Top 0.152: U3.5 29.14,32.96 28.86,32.96 28.44,32.54 28.44,23.55 28.45,23.55 28.45,18.75 27.81,18.12 26.44,18.12 U$11.P$J24
D+
  Top 0.152: D3.4 11.88,31.42 13.46,29.84 13.46,20.71 16.62,17.55 16.62,16.97 17.43,16.16 17.43,13.57 19.37,11.63 21.05,11.63 21.61,12.19 21.61,13.83 21.24,14.2 U$11.P$AD6
D-  (via drill 0.35)
  Top 0.127: D3.6 10.02,34.27 v6.32,34.27 | U$11.P$AD4 21.34,13.72 21.34,13.08 21.11,12.85 v21.11,12.53
  Route63 0.127: v6.32,34.27 6.32,31.75 7.95,30.12 7.95,20.45 | 7.9,20.5 7.95,20.45 | 7.95,20.45 13.59,14.81 19.66,14.81 21.11,13.37 v21.11,12.53
DEC4_^
  Top 0.127: U$11.P$B5 20.99,20.6 L3.2 22.41,22.02 C10.1 22.55,22.13 22.55,22.66 C16.1 22.66,23.11 22.75,23.21 23.55,23.21 23.95,22.81 C15.1 23.95,22.94 24.71,23.7 26.63,23.7 27.9,22.95 27.9,19.68 27.52,19.3 26.99,19.3 26.96,19.32 U$11.P$E24
DN  (via drill 0.35)
  Top 0.152: J4.A7 22.9,29.12 22.9,29.63 23.02,29.75 23.48,29.75 23.6,29.63 23.6,29.12 J4.B7 23.75,28.46 23.29,28.01 23.22,28.01 22.97,27.75 v22.14,27.75 | D3.1 8.38,33.32 7.95,33.75 v7.05,33.75
  Route63 0.152: v7.05,33.75 6.8,33.5 6.8,32.1 11.15,27.75 v22.14,27.75
DP  (via drill 0.35)
  Top 0.152: J4.A6 23.1,28.83 23.1,28.32 22.98,28.2 22.52,28.2 22.4,28.32 22.4,28.83 J4.B6 22.25,29.83 22.08,30 v22.08,30.05 | v10.38,29.6 10.29,29.6 D3.3
  Route63 0.152: v22.08,30.05 20.23,28.2 11.78,28.2 v10.38,29.6
EPD_3V3
  Top 0.127: DMG2305UX-7.3 24.51,8.96 24.1,8.55
  Top 0.152: C1-EP-DR.1 24.25,8.09 EPD_C5.2 24.1,8.55 21.6,8.55 20.03,10.13 | 10.34,16.25 J1.15 J1.16 14.75,15.75 15.02,15.48 15.02,14.38 18.98,10.42 19.73,10.42 20.03,10.13 | 20.03,10.13 18.62,8.72 L5.2
EPD_BUSY
  Top 0.152: J1.9 14.43,19.25 15.94,17.73 15.94,14 19,10.94 21.47,10.94 22.92,12.4 22.92,14.02 22.74,14.2 U$11.P$AD12
EPD_CS  (via drill 0.2, 0.3 pad 0.04, 0.35)
  Top 0.127: v11.86,17.75 v11.85,17.75 J1.12 | v14.93,23.09 15.36,22.66 15.36,20.38 17.79,17.95 v18.2,17.95 | U$11.P$K2 v20.14,18.17
  Route63 0.127: v20.14,18.17 19.92,17.95 v18.2,17.95
  Bottom 0.127: v11.86,17.75 11.86,18.78 14.93,21.86 v14.93,23.09
EPD_DC  (via drill 0.3 pad 0.04, 0.35)
  Top 0.127: U$11.P$AD10 22.64,13.92 22.64,12.5 21.41,11.27 19.16,11.27 16.85,13.57 v16.85,15.68 | J1.11 13.5,18.25 v15.27,16.49
  Route63 0.127: v16.85,15.68 16.07,15.68 v15.27,16.49
EPD_RST  (via drill 0.2 pad 0.04, 0.35)
  Top 0.127: v15.36,17.47 15.24,17.47 13.96,18.75 J1.10 | U$11.P$AC11 v22.42,14.77
  Bottom 0.127: v22.42,14.77 21.92,14.27 17.04,14.27 16.33,14.97 16.33,17.07 15.93,17.47 v15.36,17.47
GND  (via drill 0.2, 0.3, 0.35)
  Top 0.127: 5.38,26.86 R_TYPE_SEL.1 R2_EP_DR.1 | IC3.9 IC3.8 22.72,25.39 22.38,25.04 v22.38,24.97 | IC9.C2 IC9.C3 | U3.6 30.04,32.62 U3.9 30.7,31.96 30.7,31.93 31.01,31.62 U3.1 31.31,31.66 32.27,31.66 C37.1 | C10.2 C16.2 23.16,22.75 24,21.91 24.18,21.91 24.48,21.62 C13.2 | C15.2 24.46,22.31 24.48,22.3 | EPD_C5.1 25.05,8.37 25.05,8.26 24.77,7.97 C1-EP-DR.2 24.59,7.38 24.59,7.27 24.4,7.08 SW_ENT.1 29.66,9.23 C14.2 29.66,8.52 31.17,7.01 32.71,7.01 33.49,7.79 33.49,9.04 34.49,10.04 J2.3 35.71,10.45 35.76,10.4 | TP_GND.TP 5.65,3.13 D4.1 6.01,5.4 7.5,5.4 v9,5.4 | R3.2 19.91,23.45 v19.39,23.96 | U$11.P$78 25.21,19.79 | U$11.P$75 21.49,19.67 U$11.P$B7 23.51,18.3 23.51,18.09
  Top 0.152: J4.SH2 18.38,33.4 17.6,33.4 16.5,34.5 13.29,34.5 13.05,34.26 C43.1 13.22,33.56 13.35,33.56 13.51,33.4 v15.5,33.4 | J4.A1_B12 26.2,28.2 26.8,27.6 | J4.A12_B1 19.8,27.9 19.4,27.5 19,27.5 18.68,27.82 J4.SH4 | J4.SH3 27.32,28.12 27.17,27.97 | J4.SH1 28.1,33.7 28.46,34.06 30.82,34.06 31.27,33.6 U3.4 30.99,33.12 30.69,32.82 30.69,32.77 U3.9 | 35.16,33.64 C32.1 35.17,34.1 | 37.92,33.67 C4.2 | C4.2 37.97,33.69 | SW_DN.1 v35.4,5.1 | v35.4,5.1 | 37.19,34.1 35.17,34.1 | 35.17,34.1 35,34.1 32.66,31.76 | 37.19,34.1 37.94,34.1 | 37.94,34.1 38.69,34.1 | 38.69,34.1 38.98,34.1 v39.5,33.58 | 38.69,34.1 C3.2 | C4.2 37.94,34.1 | 37.19,34.1 C22.2 | 6.45,33.25 6.1,33.6 3.89,31.39 TP_BAT_GND.TP | C42.1 41.09,25.76 40.44,25.1 | C39.2 40.2,25.46 40.2,25.1 | 40.2,25.1 40.2,25.02 v40.71,24.51 | 40.2,25.1 40.44,25.1 | 40.44,25.1 40.86,25.1 C38.1 | C30.1 39.45,17.93 C29.1 38.7,16.91 | C27.1 42.1,21.09 R9.1 | IC1.D2 40.89,21.95 R9.1 | R9.1 41.88,19.88 v42.1,19.66 41.84,19.4 40.23,19.4 40.07,19.57 C31.1 38.33,19.57 37.2,18.43 37.18,18.43 | 5.38,26.86 v5.09,26.39 5.09,27.73 4.98,27.84 SJ1.1 5.77,27.84 6.45,28.53 6.45,33.25 | 6.45,33.25 7.15,33.25 8.04,32.37 D3.2 | C7.2 45.41,20.16 C25.2 C33.2 45.39,18.05 C6.2 45.41,17.06 v45.35,17 45.35,16.45 45.14,16.23 C8.2 | U$11.P$F23 25.09,19.07 U$11.P$78 | IC9.C2 IC9.C1 IC9.B1 30.75,25.44 30.48,25.71 30.48,26.38 30.9,26.8 31.81,26.8 C24.1 31.88,26.99 32.16,27.28 32.89,27.28 32.93,27.23 | C23.2 32.93,27.23 | C34.1 36.75,30.95 | 36.75,30.95 35.9,30.95 IC2.B3 | 32.66,31.76 33.3,31.76 33.42,31.64 33.42,31.33 33.73,31.02 | 32.66,31.76 C37.1 | C19.2 18.59,13.87 C21.2 18.95,13.85 C20.2 19.36,13.44 19.36,13.31 v19.86,12.81
  Top 0.152: v35.4,5.1 35.4,6.69 36.62,7.92 36.62,9.16 35.76,10.03 35.76,10.4 J2.5 | SW_UP.1 v13.4,5.32 | IC2.B1 33.73,31.02 | 26.8,27.6 27.17,27.97 | 27.17,27.97 v27.27,27.97 | 14.3,14.5 EPD_C9.1 14.2,13.95 v14.2,13.2 | 14.3,14.5 EPD_C6.1 | 14.3,14.5 13.4,14.5 | 13.4,14.5 EPD_C7.1 | EPD_C8.1 13.36,14.5 13.4,14.5 | J1.MP1 7.97,22.07 10.3,19.75 J1.8 12.25,19.75 13.01,20.5 EPD_C1.1 EPD_C2.1 13.01,22.4 12.5,22.91 v12.5,23.1 | v18.79,23.1 18.79,22.39 C17.1 | 38.7,16.91 37.45,16.91 C1.2 27.96,16.86 C9.2 | 37.18,18.43 X1.2 35.86,18.96 35.83,18.96 35.2,19.59 X1.4 | 37.18,18.43 38.7,16.91 | 26.8,27.6 25.57,26.38 C12.2 | R2_USB.2 23.94,27.29 v24.61,27.29 24.68,27.36 R1_USB.1 | EPD_C12.1 9.88,9.05 J1.MP2 7.97,11.97 v8.7,12.7 8.7,13.61 10.19,15.1 10.48,15.1 J1.17 | EPD_C10.1 9.64,7.5 8.9,7.5 8.7,7.71 EPD_C11.1 8.29,7.6 v7.1,7.6 | C11.2 27.42,22.08 26.95,22.55 26.09,22.55 C2.2 25.89,22.95 25.63,23.2 v25.6,23.2 25.3,23.2 24.48,22.38 24.48,22.3 C13.2 | U$11.P$74 23.51,18.09 25.21,19.79 25.21,20.29 25.26,20.34 v25.46,20.34 | C18.1 18.96,19.68 C5.2 17.82,19.68 v17.09,20.41 | 33.73,31.02 33.1,30.4 v32.7,30.4 | 32.93,27.23 32.93,27.63 v33.1,27.8 | v37.3,31.5 36.75,30.95
  pour Route2: 36.6,0.2 39.5,0.2 45.8,6.5 45.8,28.5 45.3,28.5 39,34.8 6,34.8 0.2,29 0.2,24.6 7.6,24.6 7.6,10.4 0.2,10.4 0.2,6.8 6.8,0.2 9.4,0.2 9.4,2 14.6,2 14.6,0.2 20.4,0.2 20.4,2 25.6,2 25.6,0.2 31.4,0.2 31.4,2 36.6,2
HAPTIC_EN  (via drill 0.35)
  Top 0.127: U$11.P$U1 19.51,16.32 18.93,15.74 v18.68,15.74 | v34.33,32.67 34.44,32.56 34.44,30.99 IC2.A1
  Bottom 0.127: v18.68,15.74 18.45,15.74 17.36,16.84 17.36,18.17 23.28,24.1 23.28,25.73 24,26.44 28.11,26.44 v34.33,32.67
IMU_INT1  (via drill 0.3 pad 0.04)
  Top 0.127: v18.75,17.27 19.7,17.27 U$11.P$N1 | v24.07,24.66 24,24.58 IC3.5
  Bottom 0.127: v18.75,17.27 18.75,18.81 23.54,23.6 23.54,24.12 v24.07,24.66
IMU_INT2  (via drill 0.2 pad 0.05, 0.3 pad 0.04)
  Top 0.127: U$11.P$P2 20.2,17.07 v20.13,17 | IC3.6 23.8,25.08 23.97,25.25 v23.97,25.52
  Bottom 0.127: v23.97,25.52 24.3,25.52 24.59,25.24 24.59,23.65 21.8,20.85 21.8,17.93 21.44,17.57 20.96,17.57 20.38,17 v20.13,17
LX1
  Top 0.127: IC9.B2 IC9.B3
  Top 0.152: IC9.B3 31.68,25.35 33.21,25.35 34.24,25.35 L7.1
LX2
  Top 0.152: IC9.D2 IC9.D3 31.6,24.65 33.39,24.65 33.96,24.08 L7.2
MOSI  (via drill 0.3 pad 0.04, 0.35)
  Top 0.127: J1.14 10.78,16.59 11.05,16.59 11.34,16.31 v13.2,16.31 | v23.01,20.38 22.99,20.36 U$11.P$B13
  Route63 0.127: v13.2,16.31 13.2,17.52 14.37,18.69 19.67,18.69 20.94,19.96 22.5,19.96 22.91,20.38 v23.01,20.38
N$1
  Top 0.127: L2.2 L3.1
N$2
  Top 0.152: D2.1 0.45,8.39 C2-EP-DR.1 0.45,6.05 1.46,5.04 D4.2
N$3  (via drill 0.3 pad 0.04)
  Top 0.127: v16,26.1 15.11,26.1 Q3.3 | v15.46,12.86 16.58,11.74 D5.2 15.15,9.6 13.1,9.6 10.3,6.8
  Top 0.152: C2-EP-DR.2 10.3,6.8 11.27,6.8 12.3,5.77 15.62,5.77 L5.1
  Bottom 0.127: v16,26.1 15.75,26.1 15.4,25.75 15.4,19.8 14.7,19.1 14.54,13.78 v15.46,12.86
N$7
  Top 0.152: R9.2 40.28,19.95 IC1.D1
N$8
  Top 0.127: 18.8,21.8 C17.2 18.53,21.98 18.42,21.98 16.98,23.42 X2.1
  Top 0.152: U$11.P$D2 20.14,19.67 20.14,20.56 18.89,21.8 18.8,21.8
N$9
  Top 0.127: U$11.P$F2 20.1,19.21 19.09,19.21 C18.2 17.5,19.12 16.5,20.12 16.5,20.88 X2.2
N$12
  Top 0.127: U$11.P$C1 19.54,20.02 18.48,20.02 C5.1
N$14
  Top 0.127: L2.1 20.84,21.43 20.84,20.95 20.67,20.79 20.67,20.54 20.49,20.36 U$11.P$B3
N$15  (via drill 0.35)
  Top 0.152: v37.2,21.5 36.38,20.68 X1.3 | C2.1 25.89,20.97 U$11.P$A23 | 25.94,21.79 C2.1 | v26.67,21.82 26.66,21.84 C2.1
  Route63 0.152: v37.2,21.5 26.99,21.5 v26.67,21.82
N$25
  Top 0.127: U$11.P$A18 23.96,21.09 C13.1
N$26
  Top 0.152: U$11.P$D23 25.94,19.77 25.94,20.45 26.11,20.62 27.36,20.62 C11.1
N$27
  Top 0.152: IC2.A2 34.85,32.88 35.17,33.2 C32.2
N$28  (via drill 0.35)
  Top 0.127: C1.1 35.44,17.36 33.7,19.1 | U$11.P$B24 26.77,19.79 27.12,19.79 v27.37,20.04 | X1.1 34.4,18.97 34.38,18.97 34.25,19.1 33.7,19.1 | 33.7,19.1 33.54,19.26 v33.54,19.54
  Route63 0.127: v33.54,19.54 33.26,19.54 32.54,20.26 27.59,20.26 v27.37,20.04
N$29
  Top 0.127: R2_EP_DR.2 7.41,26.65 12.35,26.65 Q3.1
N$30  (via drill 0.35)
  Top 0.152: C3.1 38.69,32.56 L1.1 39.12,32.23 39.29,32.4 v40.1,32.4 | v27.8,26.95 27.8,23.8 28.17,23.43 28.17,19.38 27.41,18.62 26.11,18.62 26.06,18.57 U$11.P$H23
  Route63 0.152: v40.1,32.4 39.3,32.4 37.7,30.8 36.2,30.8 35.1,29.7 34.1,29.7 32,27.6 28.45,27.6 v27.8,26.95
N$31
  Top 0.152: U$11.P$N24 26.98,17.32 C9.1
N$32
  Top 0.152: J1.24 10.8,11.57 EPD_C12.2
N$34
  Top 0.152: SJ1.2 3.71,26.32 4.11,25.92 5.05,25.92 | R1_EP_DR.1 5.05,25.92 | R_TYPE_SEL.2 5.88,26.3 5.49,25.92 5.05,25.92
N$35
  Top 0.152: J1.22 10.77,12.6 11.06,12.6 11.58,12.08 11.58,8.48 11.42,8.32 10.98,8.32 EPD_C10.2
N$37
  Top 0.152: J1.20 11.56,13.75 11.86,14.05 EPD_C8.2
N$38
  Top 0.152: EPD_C7.2 11.64,14.25 J1.19
N$39
  Top 0.152: J1.18 11,14.75 11.67,15.42 13.23,15.42 13.65,15 EPD_C6.2
N$46  (via drill 0.35)
  Top 0.152: L1.2 38.02,32.83 37.94,32.91 C4.1 | L1.2 37.72,32.23 37.29,32.66 37.29,33.06 C22.1 | ANT1.1 44.42,26.92 v45.2,27.7 | v38.99,31.16 38.99,31.26 L1.2
  Route63 0.152: v38.99,31.16 39.79,31.16 43.25,27.7 v45.2,27.7
N$50
  Top 0.127: C20.1 19.7,14.46 19.96,14.71 20.88,14.71 U$11.P$AC5
N$53
  Top 0.152: J1.5 11.7,21.25 12.1,20.85 EPD_C1.2
N$54
  Top 0.152: EPD_C2.2 12.35,21.75 J1.4
N$60
  Top 0.152: J4.A5 24.25,27.93 R1_USB.2
N$63
  Top 0.152: J4.B5 21.4,28.83 21.4,27.62 21.96,27.05 23.16,27.05 R2_USB.1
N$73
  Top 0.152: R4.2 30.66,24.73 30.7,24.73 IC9.D1
N$75  (via drill 0.35)
  Top 0.152: 19.39,22.52 R2.2 19.51,22.46 v19.51,21.98 | IC9.E1 30.79,20.53 31.77,19.54 v32.26,19.54
  Route63 0.152: v19.51,21.98 19.54,22.02 23.13,22.02 23.92,21.22 25.31,21.22 27.79,18.74 31.46,18.74 v32.26,19.54
N$85
  Top 0.152: IC3.1 21.55,24.23 20.4,24.23 R3.1
OUT+
  Top 0.152: IC2.A3 35.35,31.55 TP_ON.TP
OUT-
  Top 0.127: IC2.C3 35.75,29.5 TP_OP.TP
P0.13  (via drill 0.3 pad 0.04, 0.35)
  Top 0.152: R5.1 40.34,18.5 39.69,18.5 C30.2 38.18,18.32 v38.14,18.28 | SW_UP.2 v10.6,5.6 | SW_UP.2 | U$11.P$AD8 22.05,14.01 22.05,13.8 22.19,13.66 v22.19,13.43
  Route63 0.152: v10.6,5.6 10.9,5.9 17.72,5.9 22.77,10.95 22.77,12.37 | v38.14,18.28 38.56,17.86 38.56,11.16 38.5,11.1 33.07,11.1 32.28,11.89 23.26,11.89 22.77,12.37 | 22.77,12.37 22.19,12.96 v22.19,13.43
P0.14  (via drill 0.2 pad 0.05, 0.3 pad 0.04, 0.3 pad 0.05)
  Top 0.127: v21.2,5.6 21.2,4.36 SW_ENT.2 | U$11.P$AC9 21.51,14.82 v21.49,14.8 | C31.2 39.12,19.2 38.79,18.86 38.74,18.86 v38.68,18.92
  Top 0.152: R8.1 40.21,18.88 39.9,19.2 C31.2
  Bottom 0.127: v21.49,14.8 21.49,15.23 21.8,15.54 21.8,16.02 22.16,16.38 34.58,16.38 | 34.58,16.38 35.17,16.38 37.72,18.92 v38.68,18.92 | v21.2,5.6 23.8,5.6 30.46,12.26 30.46,14.24 31.33,15.11 33.31,15.11 34.58,16.38
P1.01
  Top 0.127: U$11.P$Y23 25.74,14.83 26.37,14.2 26.7,14.2 27.37,13.54 R_PWR_EPD.1 27.37,11.58 DMG2305UX-7.1
P1.02  (via drill 0.3 pad 0.25)
  Top 0.127: SW_DN.2 32.6,5.6 v32.7,5.7
  Top 0.152: R7.1 39.81,17.28 C29.2 39.76,16.85 39.76,16.71 39.67,16.62 | U$11.P$W24 26.34,15.82 27.04,16.51 39.56,16.51 39.67,16.62 | 39.67,16.62 40.49,16.62 41.72,15.39 41.72,6.86 40.56,5.7 v36.3,5.7
  Route63 0.152: v36.3,5.7 v32.7,5.7
PMIC_INT  (via drill 0.1 pad 0.04, 0.35)
  Top 0.127: IC1.A1 39.44,23.36 39.34,23.46 v38.84,23.46 | v20.18,16.09 20.18,16.52 U$11.P$T2
  Bottom 0.127: v38.84,23.46 38.66,23.46 37.14,21.94 37.02,21.94 33.85,18.78 23.36,18.78 22.98,18.41 22.98,17.92 22.64,17.57 22.16,17.57 21.78,17.2 21.78,16.72 21.44,16.38 20.95,16.38 20.66,16.09 v20.18,16.09
PREVGH
  Top 0.152: 11.63,12.87 11.26,13.25 J1.21 | D5.1 11.44,12.67 11.63,12.87 | 11.63,12.87 12.23,13.47 13.22,13.47 EPD_C9.2
PREVGL
  Top 0.152: 9.6,8.6 4.66,8.6 D2.2 | 9.6,8.6 11.3,8.6 11.3,11.86 10.91,12.25 J1.23 10.61,12.23 | EPD_C11.2 9.21,8.21 9.6,8.6
RESE
  Top 0.152: Q3.2 12.73,25.6 12.63,25.5 | 12.63,25.5 12.63,23.97 11.06,22.4 10.77,22.4 J1.3 10.34,22.25 | 6.76,24.75 6.76,24.76 | 6.76,24.76 R1_EP_DR.2 | 6.76,24.76 11.89,24.76 12.63,25.5
RESET  (via drill 0.2 pad 0.05, 0.3 pad 0.05)
  Top 0.127: v23.06,14.77 23.05,14.77 U$11.P$AC13 | J2.6 36.23,12.19 36.23,12.43 36.7,12.89 v37.99,12.89 v38,12.9 38,11.7 39.36,10.34 TP_RESET.TP
  Route63 0.127: v38,12.9 35.79,15.11 31.33,15.11 30.99,14.77 v23.06,14.77
SCK  (via drill 0.3 pad 0.04, 0.35)
  Top 0.127: J1.13 10.78,17.09 12.54,17.09 v12.63,17 | v22.92,21.38 22.92,21 U$11.P$A12
  Route63 0.127: v22.92,21.38 21.76,20.22 20.84,20.22 19.56,18.94 14.03,18.94 12.64,17.56 12.64,17.02 v12.63,17
SCL  (via drill 0.2 pad 0.05, 0.3 pad 0.04, 0.35)
  Top 0.127: 34.35,29.95 IC2.C1 | v20.38,17.57 U$11.P$M2 | 19.35,24.55 R17.2 | 19.35,24.55 19.8,25 v20.5,25 | IC3.12 21.66,24.55 19.35,24.55
  Top 0.152: R4.1 29.87,26.2 32.31,28.64 32.81,28.64 33.95,29.78 34.23,29.78 IC2.C1 34.35,29.7 34.63,29.42 TP_SCL.TP 35.23,28.03 36.73,26.54 v36.73,25.7 | U3.7 29.02,32.12 28.8,31.9 28.72,31.82 28.72,31.38 29.76,30.34 R4.1 | v38.91,26.71 37.8,25.6 37.8,23.85 38.65,23 40.23,23 IC1.B1 | R4.1 29.54,25.97 29.5,25.97 29.38,25.85 29.38,24.62 v29.05,24.28 | v17.9,17.12 17.9,17.24 17.48,17.66 17.48,17.88 14.4,20.96 14.4,23.32 16.45,25.37 18.15,25.37 18.55,24.96 R17.2
  Route63 0.127: v20.38,17.57 19.93,17.57 18.98,16.62 18.4,16.62 v17.9,17.12 | v20.5,25 21.38,24.11 25.36,24.11 25.86,24.62 27.39,24.62 27.72,24.28 v29.05,24.28
  Route63 0.152: v38.91,26.71 37.73,26.71 v36.73,25.7
SDA  (via drill 0.2 pad 0.04, 0.3 pad 0.04, 0.35)
  Top 0.127: U3.8 29.3,31.18 v30.75,29.73 | R18.2 19.65,25.62 v19.59,25.56 | U$11.P$L1 18.84,18.72 17.38,18.72 15.69,20.41 15.69,24.23 16.56,25.1 17.84,25.1 18.71,24.22 18.69,24.22 v18.51,24.4 | v37.1,26.9 37.7,26.9 38.27,27.47 38.8,28 39.67,28 | IC2.B2 v34.86,30.4
  Top 0.152: IC1.C1 40.18,22.66 38.56,22.66 37.42,23.8 37.42,26.03 38.27,26.88 38.27,27.47 | TP_SDA.TP 39.67,28 | R2.1 20.02,22.66 | IC3.2 22.17,24.01 22.17,23.9 21.19,22.91 20.27,22.91 R2.1 | 18.71,24.22 18.71,23.85 19.72,22.84 19.72,22.8 R2.1
  Route63 0.127: v19.59,25.56 19.5,25.56 19.5,26 20.4,26.9 22.9,26.9 24.54,28.54 29.56,28.54 v30.75,29.73 33.2,29.73 33.86,30.4 v34.86,30.4
  Route63 0.152: 19.5,25.56 19.5,25.39 v18.51,24.4
  Bottom 0.127: v34.86,30.4 34.86,29.4 37.1,27.16 v37.1,26.9
SWDCLK
  Top 0.152: J2.4 34.49,11.81 33.45,12.85 33.45,14.24 32.37,15.32 | 32.37,15.32 U$11.P$AA24 | 32.37,15.32 38.75,15.32 TP_SWDCLK.TP
SWDIO
  Top 0.127: J2.2 33.13,11.63 32.53,11.63 32.13,12.03 29.34,12.03 28.12,13.25 28.02,13.25 27.93,13.33 | U$11.P$AC24 26.45,14.82 27.93,13.33 | 27.93,13.33 28.29,13.33 TP_SWDIO.TP
SWO
  Top 0.127: U$11.P$AD22 25.24,13.46 TP_SWO.TP
VBAT
  Top 0.254: C27.2 42.62,21.37 | 32.27,32.23 C37.2
  Top 0.305: 42.62,23.98 41.21,22.56 IC1.C2 | 42.62,23.98 42.62,21.37 | 42.62,23.98 42.62,26.73 43.9,28 43.9,30.45 43.19,31.16 42.34,31.16 TP_VBAT.TP 40.95,32.54 40.95,33.07 39.54,34.48 34.68,34.48 32.83,32.62 U3.3 U3.2 31.38,32.23 32.27,32.23
VBUS  (via drill 0.35)
  Top 0.254: C42.2 41.66,26.06 | 41.66,24.67 C38.2
  Top 0.305: C43.2 13.05,32.62 12.73,32.3 12.7,32.3 | 12.7,32.3 11.04,32.3 D3.5 | 41.66,26.06 41.66,24.67 41.66,24.34 IC1.A2 40.68,23.62 39.6,24.7 v39,24.7 | J4.A9_B4 20.6,29.38 20.82,29.59 20.82,30.7 21.57,31.45 | 21.57,31.45 23.58,31.45 25.2,29.83 25.2,29.27 25.4,29.07 J4.A4_B9 25.3,28.88 25.3,27.83 | 25.3,27.83 | 25.3,27.83 v25.32,27.83 | 13.35,31.65 14,31 14,20.76 17,17.76 17,17.25 17.91,16.34 17.91,14.04 C21.1 18.07,13.83 18.07,13.46 19.33,12.2 20.2,12.2 20.54,12.54 20.54,13.92 20.24,14.22 U$11.P$AD2 | 13.35,31.65 12.7,32.3 | 21.57,31.45 20.92,32.1 13.8,32.1 13.35,31.65
  Route63 0.305: v39,24.7 36.69,22.4 32.05,22.4 29.29,25.16 27.98,25.16 v25.32,27.83
VREG  (via drill 0.35)
  Top 0.152: IC1.B2 41.01,22.96 42.24,24.2 42.24,27 42.2,27 | 42.2,27 40.56,27 C39.1 39.7,26.14 39.24,26.14 v38.59,25.49 | 42.2,27 42.5,27.3 TP_VREG.TP | IC9.A1 IC9.A2 IC9.A3 32.29,26.54 32.3,26.54 32.38,26.63 C24.2 33.4,25.84 v33.4,25.8 33.36,25.84 C23.1
  Route63 0.152: v33.4,25.8 32.6,25 32.6,23.4 33.1,22.9 36,22.9 v38.59,25.49
(copper drawn outside any net)
  shapes: Route63 area x1, Top area x2